# EAGLE board PCR-Voltage-Divider-Storage-Unit (EAGLE 7.7.0)

Size 160 x 101.27 mm. Coordinates in mm from the lower left corner, seen from the top.
Outline: 0,1.27 158.73,0 160,101.27 0,101.27 0,1.27
Copper layers (1*16): Top 0.035mm / dielectric 1.5mm / Bottom 0.035mm
Design rules "default": minimum track width 10mil, minimum drill 24mil, track to track 8mil, track to pad 8mil, pad to pad 8mil, via to via 8mil, smd to smd 8mil, copper to edge 40mil, drill to drill 8mil, minimum pad ring 10mil, minimum via ring 8mil, stop-mask expansion 4mil, vias tented up to drill 0mil, thermal gap 10mil
Net classes: 0 default: width 0.254 mm, clearance 0.254 mm; 1 Power: width 0.406 mm, clearance 0.254 mm; 2 Phone: width 0.305 mm, clearance 0.381 mm; 3 Nasty Loads: width 0.61 mm, clearance 0.61 mm

## Footprints (pad centres in the part's own frame; a part is rotated, then mirrored left to right if it is on the bottom)
E2,5-7 = drill 0.813 pad 1.6: + -1.27,0 | drill 0.813 pad 1.6 octagon: - 1.27,0
1X02_LOCK = drill 1.016 pad 1.88: 1 -0.178,0; 2 2.718,0
DIODE-1N4001 = drill 1 pad 1.981: A 5.08,0; C -5.08,0
AXIAL-0.4-RES = drill 0.9 pad 1.88: P$1 -5.08,0; P$2 5.08,0

## Placement (x,y rotation side)
C1  .22F @ 2.5V  [E2,5-7]  27.94,11.43 0 top
C2  .22F @ 2.5V  [E2,5-7]  39.37,11.43 0 top
C3  .22F @ 2.5V  [E2,5-7]  52.07,11.43 0 top
C4  .22F @ 2.5V  [E2,5-7]  66.04,11.43 0 top
C5  .22F @ 2.5V  [E2,5-7]  80.01,11.43 0 top
C6  .22F @ 2.5V  [E2,5-7]  93.98,11.43 0 top
CON1  [1X02_LOCK]  118.11,39.37 90 top
D1  1N5819  [DIODE-1N4001]  33.02,44.45 180 top
R1  220  [AXIAL-0.4-RES]  46.99,76.2 0 top
R2  220  [AXIAL-0.4-RES]  46.99,78.74 0 top
R3  10K @ .25W  [AXIAL-0.4-RES]  16.51,31.75 180 top
R4  10K @ .25W  [AXIAL-0.4-RES]  35.56,31.75 180 top
R5  10K @ .25W  [AXIAL-0.4-RES]  52.07,31.75 180 top
R6  10K @ .25W  [AXIAL-0.4-RES]  68.58,31.75 180 top
R7  10K @ .25W  [AXIAL-0.4-RES]  87.63,31.75 180 top
R8  10K @ .25W  [AXIAL-0.4-RES]  104.14,31.75 180 top

## Library data of the parts
C1-C6 = rcl
CON1 D1 R1-R8 = SPCoast

## Nets
N$1: C1.- C2.+ R3.P$1 R4.P$2
N$2: C2.- C3.+ R4.P$1 R5.P$2
N$4: C4.- C5.+ R6.P$1 R7.P$2
N$5: C5.- C6.+ R7.P$1 R8.P$2
N$6: C1.+ D1.A R1.P$1 R2.P$1 R3.P$2
N$9: C3.- C4.+ R5.P$1 R6.P$2
NEG: C6.- CON1.1 R8.P$1
POS: CON1.2 D1.C R1.P$2 R2.P$2

## Tracks (layer width: path | path; a pad name or v marks a point on that pad's centre or on a via)
N$1  (3 unrouted)
N$2  (3 unrouted)
N$4  (3 unrouted)
N$5  (3 unrouted)
N$6  (4 unrouted)
N$9  (3 unrouted)
NEG  (2 unrouted)
POS  (3 unrouted)